# Altium PCB RC Transmitter PCBDoc.PcbDoc
Units mil, origin at the board's own origin, x right, y up, seen from the top; angles counter-clockwise.
Board outline 4175 x 2675 mil, 2 copper layers (Top Layer, Bottom Layer); 25 components, 27 nets, 156 pads, 3 vias.
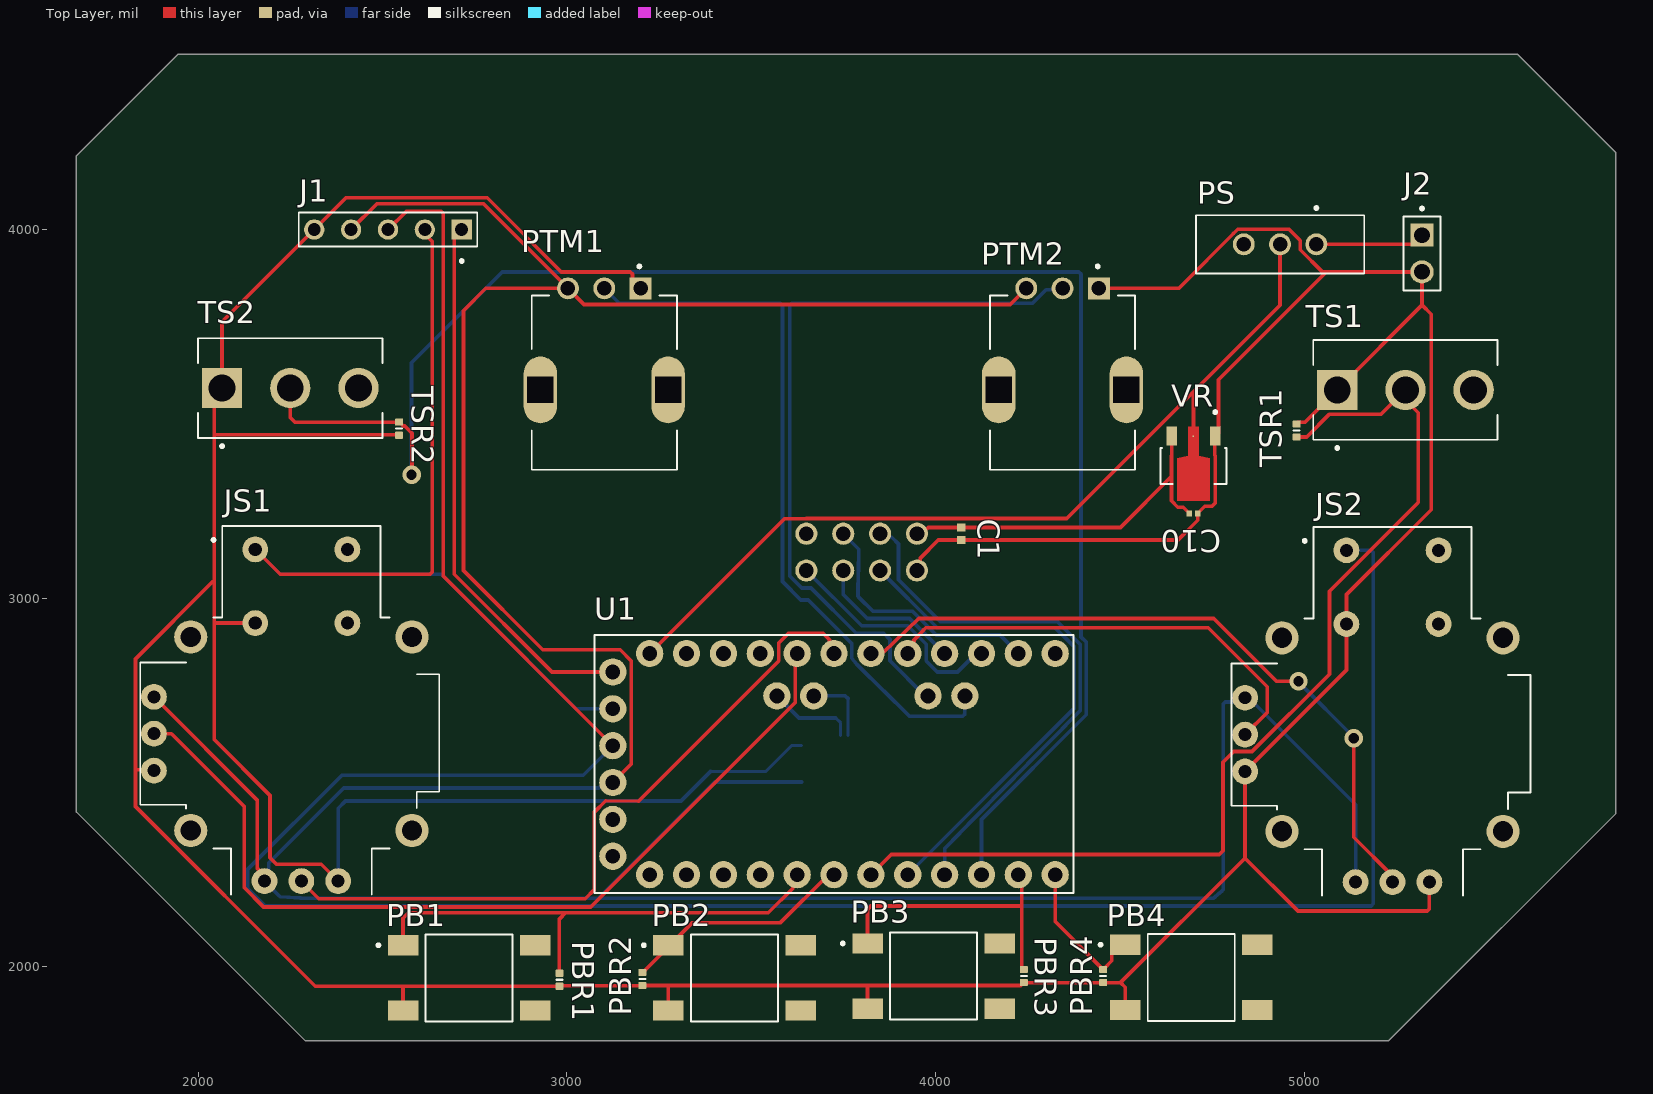
[diagram p0: Top Layer view]
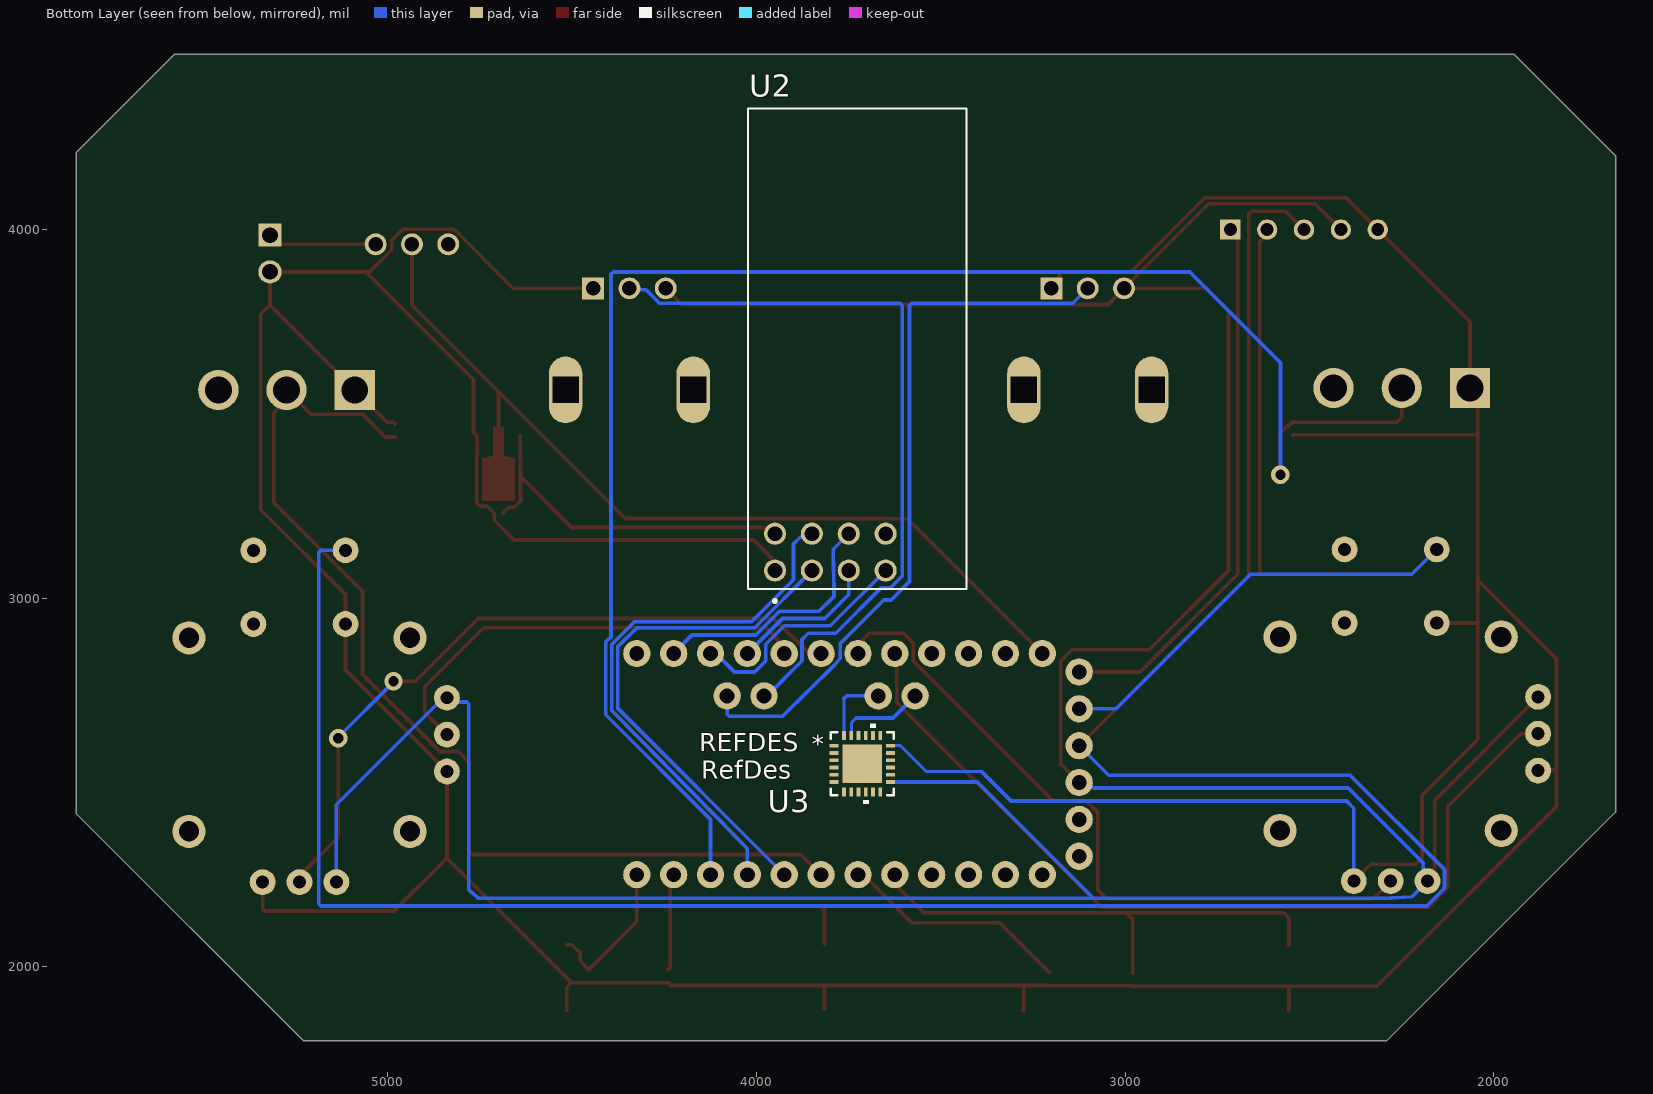
[diagram p1: Bottom Layer view, seen from below]
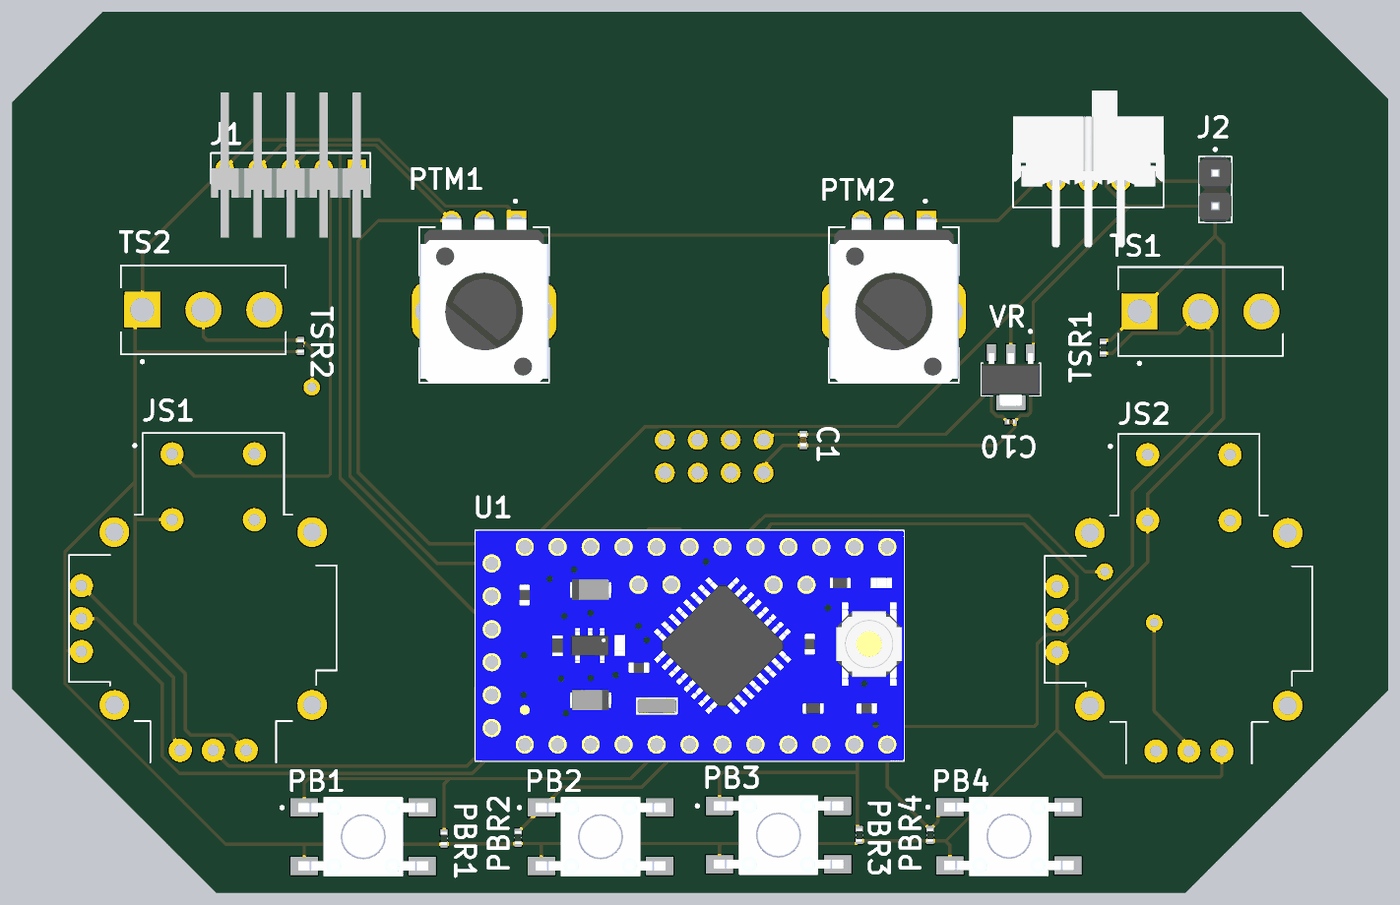
[diagram p2: 3D render of the assembled board from above, using the file's embedded part models]

## Layer stack, top to bottom
Top Solder: solder mask 0.4, Solder Resist, Dk 3.5
Top Layer: signal copper 1.4
Dielectric 1: dielectric 12.6, FR-4, Dk 4.8
Bottom Layer: signal copper 1.4
Bottom Solder: solder mask 0.4, Solder Resist, Dk 3.5

## Board outline
1670,2420 1670,4200 1945,4475 5580,4475 5845,4210 5845,2415 5230,1800 2290,1800

## Design rules (kind name [scope] priority, off if disabled: settings)
Clearance [All] p1: gap=6 ignorepadtopadclearanceinfootprint=FALSE
Height [All] p1: minheight=0 maxheight=1500 prefheight=500
MinimumSolderMaskSliver [All] p1: minsoldermaskwidth=4
PolygonConnect [All] p1: connectstyle=Relief reliefconductorwidth=10 reliefentries=4 polygonreliefangle="90 Angle" airgapwidth=10
RoutingVias [All] p1: holewidth=28 width=50 viastyle="Through Hole" minholewidth=28 minwidth=50 maxholewidth=28 maxwidth=50
SilkToSolderMaskClearance [IsPad] p1: minsilkscreentomaskgap=0 clearancetoexposedcopper=FALSE
SolderMaskExpansion [All] p1: expansion=4 istentingtop=FALSE
SupplyNets "Schematic Supply Nets" [InNet('GND')] p1: voltage=0.000
Width [All] p1: maxlimit=10 minlimit=7 preferedwidth=10
27 further rules are at their usual default settings.

## Classes and differential pairs
component class "RC Transmitter Frontend": J1 J2 JS1 JS2 PB1 PB2 PB3 PB4 PBR1 PBR2 PBR3 PBR4 PS PTM1 PTM2 TS1 TS2 TSR1 TSR2 U1 VR
component class "RC Transmitter Backend": C1 C10 U2 U3

## Components (designator, comment, footprint, x,y, rotation, side; value= is the part's Value field where it differs from the comment)
C1 "1nF" CAPC1005X55N 4070,3175 r270 top
C10 "10nF" CAPC0603X33N 4700,3230 r0 top
J1 "5-146280-5" TE_5-146280-5 2515,4000 r180 top
J2 "M20-9990246" HARWIN_M20-9990246 5320,3935 r270 top
JS1 "COM-09032" XDCR_COM-09032 2280,2632.5 r0 top
JS2 "COM-09032" XDCR_COM-09032 5240,2630 r0 top
PB1 "TS04-66-70-BK-260-SMT" SW_TS04-66-70-BK-260-SMT 2735,1970 r0 top
PB2 "TS04-66-70-BK-260-SMT" SW_TS04-66-70-BK-260-SMT 3455,1970 r0 top
PB3 "TS04-66-70-BK-260-SMT" SW_TS04-66-70-BK-260-SMT 3995,1975 r0 top
PB4 "TS04-66-70-BK-260-SMT" SW_TS04-66-70-BK-260-SMT 4694.13,1971.42 r0 top
PBR1 "10KR2F" RESC0402(1005)_L 2980,1965 r90 top value=10k
PBR2 "10KR2F" RESC0402(1005)_L 3205,1967.28 r90 top value=10k
PBR3 "10KR2F" RESC0402(1005)_L 4240,1975 r90 top value=10k
PBR4 "10KR2F" RESC0402(1005)_L 4455,1975 r90 top value=10k
PS "EG1218" SW_EG1218 4935,3960 r180 top
PTM1 "PT01-D130D-B103" TRIM_PT01-D130D-B103 3101.77,3565 r180 top
PTM2 "PT01-D130D-B103" TRIM_PT01-D130D-B103 4345,3565 r180 top
TS1 "100SP1T1B4M2QE" SW_100SP1T1B4M2QE 5275,3565 r90 top
TS2 "100SP1T1B4M2QE" SW_100SP1T1B4M2QE 2250,3570 r90 top
TSR1 "10KR2F" RESC0402(1005)_L 4980,3455 r270 top value=10k
TSR2 "10KR2F" RESC0402(1005)_L 2545,3460 r90 top value=10k
U1 "ARDUINO_PRO_MINI" MODULE_ARDUINO_PRO_MINI 3725,2550 r90 top
U2 "NRF24L01P-MODULE-PCB" XCVR_NRF24L01P-MODULE-PCB 3726.82,3676.75 r90 bottom
U3 "MPU-6050" QFN24_4X4X0P9-0P5_TDK-L 3713.56,2550.78 r180 bottom
VR "HT7333" IC_HT7333 4700,3365 r180 top

## Footprints (in the part's own frame and the unit in brackets; to place one, negate y for a bottom-side part, rotate by r counter-clockwise, add the part's x,y. Pads: shape width x height; smd on the part's side, far side on the other; paste and mask are expansions set on the pad)
CAPC0603X33N [mm]
  rect 0.38x0.4 smd: 1(-0.281,0) 2(0.281,0)
  body extent -0.3,-0.15 0.3,0.15, height 0.33
CAPC1005X55N [mm]
  rect 0.54x0.6 smd: 1(-0.432,0) 2(0.432,0)
  body extent -0.5,-0.25 0.5,0.25, height 0.55
HARWIN_M20-9990246 [mm]
  rect 1.605x1.605 / inner round 1.605 / far side rect 1.605x1.605 hole 1.07: 1(-1.27,0)
  round 1.605 hole 1.07: 2(1.27,0)
  silkscreen extent -3.2,-1.27 2.54,1.27, body extent -2.54,-1.27 2.54,1.27, height 8.74
IC_HT7333 [mm]
  rect 0.7x1.3 smd: 1(-1.5,-1.9) 3(1.5,-1.9)
  rect 0.1x0.1 smd paste-1 mask+0: 2(0,-1.9)
  Top Layer region: 1.125,-0.375 0.35,-0.56 0.35,-2.55 -0.35,-2.55 -0.35,-0.56 -1.125,-0.375 -1.125,2.55 1.125,2.55
  silkscreen extent -2.27,-3.65 2.27,1.41, body extent -2.25,-1.88 2.25,2.21, height 1.6
MODULE_ARDUINO_PRO_MINI [mil]
  round 74 hole 40: JP1_1(250,600) JP1_2(150,600) JP1_3(50,600) JP1_4(-50,600) JP1_5(-150,600) JP1_6(-250,600) JP2_1(185,55) JP2_2(185,155) JP3_1(185,-355) JP3_2(185,-255) JP6_1(300,500) JP6_2(300,400) JP6_3(300,300) JP6_4(300,200) JP6_5(300,100) JP6_6(300,0) JP6_7(300,-100) JP6_8(300,-200) JP6_9(300,-300) JP6_10(300,-400) JP6_11(300,-500) JP6_12(300,-600) JP7_1(-300,-600) JP7_2(-300,-500) JP7_3(-300,-400) JP7_4(-300,-300) JP7_5(-300,-200) JP7_6(-300,-100) JP7_7(-300,0) JP7_8(-300,100) JP7_9(-300,200) JP7_10(-300,300) JP7_11(-300,400) JP7_12(-300,500)
  silkscreen extent -350,-650 350,650, body extent -350,-650 350,650, height 133
QFN24_4X4X0P9-0P5_TDK-L [mil]
  rect 23.87x10.03 smd paste+0 mask+0: 1(-76.44,49.22) 2(-76.44,29.53) 3(-76.44,9.84) 4(-76.44,-9.85) 5(-76.44,-29.54) 6(-76.44,-49.22) 13(76.44,-49.22) 14(76.44,-29.54) 15(76.44,-9.85) 16(76.44,9.84) 17(76.44,29.53) 18(76.44,49.22)
  rect 10.03x23.87 smd paste+0 mask+0: 7(-49.22,-76.44) 8(-29.53,-76.44) 9(-9.84,-76.44) 10(9.85,-76.44) 11(29.54,-76.44) 12(49.22,-76.44) 19(49.22,76.44) 20(29.54,76.44) 21(9.85,76.44) 22(-9.84,76.44) 23(-29.53,76.44) 24(-49.22,76.44)
  rect 108x104 smd paste+0 mask+0: 25(0,0)
  silkscreen extent -86,-108 86,108, body extent -81,-81 81,81, height 37
RESC0402(1005)_L [mm] "Chip Resistor, Body 1.0x0.5mm, IPC High Density"
  rrect25% 0.5x0.55 smd: 1(-0.45,0) 2(0.45,0)
  silkscreen extent 0,-0.2 0,0.2, body extent -0.5,-0.25 0.5,0.25, height 0.3
SW_100SP1T1B4M2QE [mm]
  rect 2.775x2.775 hole 1.85: 1(0,4.7)
  round 2.775 hole 1.85: 2(0,0) 3(0,-4.7)
  silkscreen extent -4.1,-6.35 3.43,6.35
SW_EG1218 [mm]
  round 1.508 hole 1: 1(-2.5,0) 2(0,0) 3(2.5,0)
  silkscreen extent -5.8,-2.6 5.8,2, body extent -5.8,-7 5.8,5.1, height 2
SW_TS04-66-70-BK-260-SMT [mm]
  rect 2.1x1.4 smd: 1(-4.55,2.25) 2(-4.55,-2.25) 3(4.55,2.25) 4(4.55,-2.25)
  silkscreen extent -6.35,-3 3,3, body extent -5,-3 5,3, height 7
TE_5-146280-5 [mm]
  rect 1.398x1.398 / inner round 1.398 / far side rect 1.398x1.398 hole 0.89: 1(-5.08,0)
  round 1.398 hole 0.89: 2(-2.54,0) 3(0,0) 4(2.54,0) 5(5.08,0)
  silkscreen extent -6.15,-1.17 6.15,2.27, body extent -6.15,-5.84 6.15,5.33, height 1.17
TRIM_PT01-D130D-B103 [mm]
  rect 1.508x1.508 / inner round 1.508 / far side rect 1.508x1.508 hole 1: 1(-2.5,-7)
  round 1.508 hole 1: 2(0,-7) 3(2.5,-7)
  oval 2.3x4.6 hole 1.8 square: S1(-4.4,0) S2(4.4,0)
  silkscreen extent -5,-8.61 5,5.5, body extent -5.7,-7.2 5.7,5.5, height 30.5
XCVR_NRF24L01P-MODULE-PCB [mil]
  round 60 hole 40: 1(-601.75,223.18) 2(-501.75,223.18) 3(-601.75,123.18) 4(-501.75,123.18) 5(-601.75,23.18) 6(-501.75,23.18) 7(-601.75,-76.82) 8(-501.75,-76.82)
  silkscreen extent -688,-297 652,297
XDCR_COM-09032 [mil]
  round 70 hole 35.43: B1A(-125,500) B1B(125,500) B2A(-125,300) B2B(125,300)
  round 70 hole 35: H1(-100,-400) H2(0,-400) H3(100,-400) V1(-400,100) V2(-400,0) V3(-400,-100)
  round 90 hole 55: S1(-300,262.5) S2(-300,-262.5) S3(300,-262.5) S4(300,262.5)
  silkscreen extent -437,-437 374,563

## Part data
C1: library part GRM155R61A102KA01D, "SMD-ÐºÐ¾Ð½Ð´ÐµÐ½ÑÐ°Ñ‚Ð¾Ñ€ X5R(EIA) Ñ Ñ‘Ð¼ÐºÐ¾ÑÑ‚ÑŒÑŽ 1000 Ð¿Ð¤, Ð´Ð¾Ð¿ÑƒÑÐº 10 %. ÐÐ¾Ð¼Ð¸Ð½Ð°Ð»ÑŒÐ½Ð¾Ðµ Ð½Ð°Ð¿Ñ€ÑÐ¶ÐµÐ½Ð¸Ðµ: 10 Ð’ Ð¿Ð¾ÑÑ‚Ð¾ÑÐ½Ð½Ð¾Ð³Ð¾ Ñ‚Ð¾ÐºÐ°", Package="1005-2 Murata", Check_prices=https://www.snapeda.com/parts/GRM155R61A102KA01D/Murata+Electronics+North+America/view-part/?ref=eda, MF="Murata Electronics", MP=GRM155R61A102KA01D, SnapEDA_Link=https://www.snapeda.com/parts/GRM155R61A102KA01D/Murata+Electronics+North+America/view-part/?ref=snap
C10: library part GRM033R71A103KA01D, "10000 pF Â±10% 10V Ceramic Capacitor X7R 0201 (0603 Metric)", Package="0603 Murata", Check_prices=https://www.snapeda.com/parts/GRM033R71A103KA01D/Murata/view-part/?ref=eda, ComponentLink1Description="New link", MF=Murata, MP=GRM033R71A103KA01D, SnapEDA_Link=https://www.snapeda.com/parts/GRM033R71A103KA01D/Murata/view-part/?ref=snap
J1: "05 MODII HDR SRST B/A .100CL", Package=None, Availability=Unavailable, MP=5-146280-5, Price=None
J2: "2.54mm (0.1) Pitch SIL Vertical Throughboard Pin Header, 6.1mm mating pin height, tin, 2 contacts", Package=None, Check_prices=https://www.snapeda.com/parts/M20-9990246/Harwin/view-part/?ref=eda, MF=Harwin, MP=M20-9990246, SnapEDA_Link=https://www.snapeda.com/parts/M20-9990246/Harwin/view-part/?ref=snap
JS1 JS2: "Thumb Joystick", Package=None, Availability=Unavailable, MP=COM-09032, Price=None
PB1 PB2 PB3 PB4: "6 x 6 mm, 7 mm Actuator Height, 260 gf, Black, Surface Mount, SPST, Tactile Switch", Package=None, Check_prices=https://www.snapeda.com/parts/TS04-66-70-BK-260-SMT/Same+Sky/view-part/?ref=eda, MF="Same Sky", MP=TS04-66-70-BK-260-SMT, SnapEDA_Link=https://www.snapeda.com/parts/TS04-66-70-BK-260-SMT/Same+Sky/view-part/?ref=snap
PBR1 PBR2 PBR3 PBR4 TSR1 TSR2: library part CMP-009-00066-2, "10K 0.063W 1% 0402 (1005 Metric)  SMD", Case/Package=0402, Power=63mW, Tolerance=1%, Mounting Technology=SMT, Pins=2
PS: "Slide Switch, EG Series, SPDT, Non-Shorting, ON-ON, 200mA DC, 30VDC, PC Pin", Package=None, Check_prices=https://www.snapeda.com/parts/EG1218/E-Switch/view-part/?ref=eda, MF=E-Switch, MP=EG1218, SnapEDA_Link=https://www.snapeda.com/parts/EG1218/E-Switch/view-part/?ref=snap
PTM1 PTM2: "10 mm, Vertical, Linear, 10 kÎ©, Through Hole, D-cut Rotary Potentiometer", Package=None, Check_prices=https://www.snapeda.com/parts/PT01-D130D-B103/Same+Sky/view-part/?ref=eda, MF="Same Sky", MP=PT01-D130D-B103, SnapEDA_Link=https://www.snapeda.com/parts/PT01-D130D-B103/Same+Sky/view-part/?ref=snap
TS1 TS2: "Toggle Switch SPDT Through Hole", Package=None, Availability=Unavailable, MP=100SP1T1B4M2QE, Price=None
U1: "This board was developed for applications and installations where space is premium and projects are made as permanent set ups. Small, available in 3.3 V and 5 V versions, powered by ATmega328P.", Package=None, Check_prices=https://www.snapeda.com/parts/Arduino%20Pro%20Mini/Arduino/view-part/?ref=eda, MF=Arduino, MP="Arduino Pro Mini", SnapEDA_Link=https://www.snapeda.com/parts/Arduino%20Pro%20Mini/Arduino/view-part/?ref=snap
U2: "- Transceiver For Use With nRF24L01+", Package=None, Availability=Bad, MF="Nordic Semiconductor", Mouser-Purchase-URL=https://snapeda.com/shop?store=Mouser&id=230534, MP=NRF24L01P-MODULE-PCB, Price=None, SnapEDA_Link=https://www.snapeda.com/parts/NRF24L01P-MODULE-PCB/Nordic%20Semiconductor%20ASA/view-part/230534/?ref=snap
U3: "Description", Manufacturer_Name=TDK, Copyright="Copyright (C) 2025 Ultra Librarian. All rights reserved.", Manufacturer_Part_Number=MPU-6050, RefDes=RefDes, Type="Motion Sensors"
VR: "Three-terminal, low power, high voltage regulator implemented in CMOS technology", Package=None, Check_prices=https://www.snapeda.com/parts/HT7333/Holtek/view-part/?ref=eda, MF="Holtek Semiconductor", MP=HT7333, SnapEDA_Link=https://www.snapeda.com/parts/HT7333/Holtek/view-part/?ref=snap

## Via types
v1: diameter 50, hole 28, Top Layer to Bottom Layer, 3 vias

## Nets (pads, with @x,y where several pads share a name; then routed paths per layer and width w, separated by ;. In a path a pad name is that pad's centre, name@x,y a point inside that pad or via, vN(x,y) a via of type N, cw(c..) or ccw(c..) an arc to the next point about the centre after c; other vN are vias at no path point)
DTR: J1.1 U1.JP1_1 | length 1483.1
  Top Layer w10: J1.1 2695,3980 2695,3065 2960,2800 U1.JP1_1
GND: C1.2 C10.2 J1.5 J2.2 JS1.B2A JS1.H3 JS1.V3 JS2.B2A JS2.H3 JS2.V3 PB1.2 PB2.2 PB3.2 PB4.2 PBR1.1 PBR2.1 PBR3.1 PBR4.1 PTM1.1 PTM2.1 TS1.1 TS2.1 TSR1.1 TSR2.1 U2.1 U3.18 VR.1 | length 15249.2
  Top Layer w10: JS1.V3 1877.5,2535 1830,2535 ; 2040,3045 1830,2835 1830,2535 ; JS1.B2A 2045.99,2932.5 2043.49,2930 ; JS1.H3 2334,2278.5 2212.36,2278.5 2195,2295.86 2195,2465 2043.49,2616.51 2043.49,2930 ; TSR2.1 2544.18,3443.1 2045.38,3443.1 2043.49,3445 ; PB1.2 2555.87,1946.42 2555,1947.28 ; PTM1.1 3178.17,3862.62 3178.17,3879.14 3172.31,3885 2985,3885 2784,4086 2401,4086 J1.5 2064.96,3749.96 TS2.1 2043.49,3548.53 2043.49,3445 ; PB2.2 3275,1882.28 3275,1949.57 ; PB3.2 3815.87,1945.43 3820,1949.57 ; U2.1 3959.32,3084.33 3959.32,3109.32 4007.99,3157.99 C1.2 4657.99,3157.99 4711.42,3211.42 4711.42,3230.52 4730.5,3249.61 4750.5,3249.61 4759.29,3258.39 4759.29,3385.98 4757.63,3387.63 4757.63,3438.38 VR.1 4767.83,3448.58 4767.83,3592.83 5060,3885 ; PTM2.1 4656.45,3840.59 4660.59,3840.59 4666.45,3846.45 4807.71,3988.67 cw(c4836.57,3960) 4809.05,3989.96 4817.81,3998.04 4820.69,4000.69 4959.31,4000.69 4990,3970 4990,3945 5050,3885 5060,3885 ; PB4.2 4515,1944.68 4502.39,1957.28 ; TSR1.1 4984.84,3477.56 5002.52,3477.56 TS1.1 5320,3795.04 ; JS2.H3 5340,2157.28 5334.14,2151.42 4983.47,2151.42 4840,2294.89 ; 1830,2535 1830,2435.15 2317.86,1947.28 2555,1947.28 ; 2043.49,2930 2043.49,3045 2043.49,3445 ; 2555,1947.28 PBR1.1 2981.14,1948.43 3203.86,1948.43 PBR2.1 3275,1949.57 ; 3275,1949.57 3815.87,1949.57 3820,1949.57 ; 3820,1949.57 4231.3,1949.57 4239.02,1957.28 PBR3.1 PBR4.1 4502.39,1957.28 ; 4502.39,1957.28 4840,2294.89 ; 4840,2294.89 JS2.V3 5115,2805 JS2.B2A 5115,3010 5345,3240 5345,3770.04 5320,3795.04 ; 5060,3885 J2.2 5320,3795.04
  Bottom Layer w8: 3390,2530 3540,2530 3610,2600 U3.18
  Bottom Layer w10: JS1.V3 JS1.V3@1896.24,2532.5 ; JS1.H3 2380,2430 2400,2450 3310,2450 3390,2530
JSH1: JS1.H2 U1.JP6_6 | length 1952.3
  Top Layer w10: JS1.H2 2327.5,2185 3050,2185 3075,2210 3075,2420 3105.5,2450.5 3194.5,2449.5 3575,2830 3575,2878.71 3601.29,2905 3695,2905 3712.75,2887.25 3712.75,2862.25 U1.JP6_6
JSH2: JS2.H2 U1.JP6_7 | length 1919.1
  Top Layer w10: U1.JP6_7 3855.62,2850 3891.86,2884.73 3955,2945 4755,2945 4925,2775 v1(4985,2775) ; v1(5135,2620) 5135,2351.24 5240,2246.24 JS2.H2
  Bottom Layer w10: v1(4985,2775) 4985,2772.5 5135,2622.5 v1(5135,2620)
JSV1: JS1.V2 U1.JP6_5 | length 2428.2
  Top Layer w10: JS1.V2 1927.5,2632.5 2125,2435 2125,2236.23 2125,2214.99 2177.49,2162.5 3065.38,2162.5 3620,2717.12 3620,2845 U1.JP6_5
JSV2: JS2.V2 U1.JP6_8 | length 1237.5
  Top Layer w10: U1.JP6_8 3936.77,2861.77 3936.77,2879.09 3941.77,2884.09 3941.77,2886.77 3967.93,2912.93 3967.93,2914.14 3973.79,2920 4740,2920 4900,2760 4900,2690 JS2.V2
NetC1_1: C1.1 C10.1 U2.2 VR.3 | length 993.6
  Top Layer w10: U2.2 3963.53,3175 3980.54,3192.01 C1.1 4502.01,3192.01 4640.71,3330.71 ; VR.3 4640.94,3386.21 4640.71,3385.98 4640.71,3330.71 ; C10.1 4688.94,3230.39 4672.31,3247.02 4657.74,3247.02 4640.71,3264.05 4640.71,3330.71
NetJ2_1: J2.1 PS.1 | length 296.9
  Top Layer w10: PS.1 5295,3960 J2.1
NetPB1_1: PB1.1 PBR1.2 U1.JP7_8 | length 1376.9
  Top Layer w10: PB1.1 2555.87,2132.37 2570,2146.5 2996.5,2146.5 ; PBR1.2 2980,2130 2996.5,2146.5 ; U1.JP7_8 3612.75,2237.75 3612.75,2212.75 3546.5,2146.5 2996.5,2146.5
NetPB2_1: PB2.1 PBR2.2 U1.JP7_7 | length 629.8
  Top Layer w10: PBR2.2 3205.98,1985 3340.98,2120 3580,2120 3710,2250 U1.JP7_7
NetPB3_1: PB3.1 PBR3.2 U1.JP7_2 | length 784.7
  Top Layer w10: PB3.1 3815.87,2155.87 3825,2165 4234.17,2165 ; U1.JP7_2@4225,2243.71 U1.JP7_2 4234.17,2240.83 4234.17,2165 ; PBR3.2 4239.02,1992.72 4234.17,1997.56 4234.17,2165
NetPB4_1: PB4.1 PBR4.2 U1.JP7_1 | length 412.5
  Top Layer w10: U1.JP7_1 4325,2122.72 4449.17,1998.54 4449.17,1997.56 4454.02,1992.72 PBR4.2 4455.98,1992.72 4460.83,1997.56 4460.83,1998.54 4478.66,2016.38 4478.66,2037.44 4501.22,2060 PB4.1
NetPS_2: PS.2 U1.JP6_1 VR.2 | length 2386.2
  Top Layer w10: U1.JP6_1 3587.07,3212.07 3590,3215 3649.25,3215.99 cw(c3650,3175) 3650,3216 3950,3216 cw(c3950,3175) 3950.12,3216 4356,3216 4700,3560 ; VR.2 4700,3560 ; PS.2 4935,3795 4700,3560
NetPTM1_2: PTM1.2 U1.JP3_1 | length 1973
  Bottom Layer w10: PTM1.2 3142.46,3799.91 3579.14,3799.91 3585,3794.05 3585,3045 3635,2995 3655,2995 3773,2877 3773,2840.87 3773,2836.73 3788.71,2818.58 ccw(c3825,2850) 3791.39,2815.73 3926.55,2682.87 3929.47,2680 3933.56,2680 4074.14,2680 4080,2685.86 U1.JP3_1
NetPTM2_2: PTM2.2 U1.JP3_2 | length 2036.9
  Bottom Layer w10: U1.JP3_2 3972.12,2735 3877,2830.12 3877,2888 3860,2905 3785,2905 3662.5,3027.5 3637.5,3027.5 3605,3060 3605,3794.05 3610.86,3799.91 4263.43,3799.91 4300.31,3836.79 4341.2,3836.79 PTM2.2
NetU1_JP2_1: U1.JP2_1 U3.24 | length 196.4
  Bottom Layer w8: U3.24 3762.79,2727.79
  Bottom Layer w10: U1.JP2_1 3755.58,2735 3762.79,2727.79
NetU1_JP2_2: U1.JP2_2 U3.23 | length 238.1
  Bottom Layer w8: 3730.01,2674.99 3743.1,2661.9 U3.23
  Bottom Layer w10: U1.JP2_2 3630.01,2674.99 3730.01,2674.99
NetU1_JP6_9: U1.JP6_9 U2.5 | length 406.3
  Bottom Layer w10: U2.5 3750,3010 3815,2945 3930,2945 U1.JP6_9
NetU1_JP6_10: U1.JP6_10 U2.7 | length 636
  Bottom Layer w10: U2.7 3800,2925 3925,2925 3975,2875 3975,2830 4005,2800 4060,2800 4110,2850 U1.JP6_10
NetU1_JP6_11: U1.JP6_11 U2.6 | length 686.6
  Bottom Layer w10: U2.6 3791.88,3133.12 3791.88,3128.89 3790,3013.28 3790,3005 3792.93,3002.07 3830,2965 3937.38,2965 4002.38,2900 4175,2900 U1.JP6_11
NetU1_JP7_4: U1.JP7_4 U2.4 | length 1499.1
  Bottom Layer w10: U2.4 3859.57,3165.43 3881.77,3165.43 3900,3147.2 3900,3050 4014,2936 4331.37,2936 4393,2874.37 4393,2695.37 4390.13,2692.45 4109,2406.63 4025,2320 4025,2315.86 U1.JP7_4
NetU1_JP7_5: U1.JP7_5 U2.3 | length 1417.8
  Bottom Layer w10: U2.3 4005,2920 4324.75,2920 4377,2867.75 4377,2702 U1.JP7_5
Rx1: J1.3 JS2.B1A U1.JP1_3 | length 7092.8
  Top Layer w10: J1.3 2565,4050 2659.14,4050 2665,4044.14 2665,3060 U1.JP1_3
  Bottom Layer w10: U1.JP1_3 3045,2520 2390,2520 2134,2264 2134,2213.45 2182.45,2165 5181.64,2165 5187.5,2170.86 5187.5,3124.14 5181.64,3130 JS2.B1A
TS1: TS1.2 TSR1.2 U1.JP7_6 | length 2842.2
  Top Layer w10: U1.JP7_6 3880,2305 4770,2305 4780,2315 4780,2555 4809,2584 4859.05,2584 5069,2793.95 5069,3018.95 5310,3259.95 5310,3503.14 5275,3538.14 TS1.2 5209.37,3499.37 5069.37,3499.37 5007.28,3437.28 TSR1.2@4980.98,3437.28
TS2: TS2.2 TSR2.2 U1.JP7_3 | length 4517.6
  Top Layer w10: TS2.2 2250,3490 2262.28,3477.72 2545.98,3477.72 2556.57,3467.13 2560.6,3467.13 2580,3447.72 2580,3336 v1(2579,3335)
  Bottom Layer w10: v1(2579,3335) 2579,3639 2825,3885 4389.14,3885 4395,3879.14 4395,2895 4409,2881 4409,2684 4125,2400 U1.JP7_3
TX0: J1.2 JS1.B1A U1.JP1_2 | length 2597
  Top Layer w10: JS1.B1A 2222.5,3065 2629.14,3065 2635,3070.86 2635,3967.81 2615,3987.81 J1.2
  Bottom Layer w10: JS1.B1A 2222.5,3065 2428.99,3065 2660,3065 3025,2700 U1.JP1_2
VCC: J1.4 JS1.H1 JS1.V1 JS2.H1 JS2.V1 PTM1.3 PTM2.3 U1.JP1_4 U3.13 | length 10121.3
  Top Layer w10: JS1.V1 2160,2452.5 2160,2268.36 2180,2248.36 JS1.H1 ; J1.4 2485,4070 2773.94,4070 PTM1.3 ; U1.JP1_4 3175,2550 3175,2830 3145,2860 2935,2860 2720,3075 2720,3780 2780.59,3840.59 PTM1.3 ; PTM2.3 4202.95,3796.97 3046.97,3796.97 PTM1.3
  Bottom Layer w10: U1.JP1_4 3112.75,2487.75 3089.9,2487.75 3087.14,2485 2395,2485 2191.48,2281.48 2191.48,2243.98 JS1.H1 2219.57,2192.93 2222.5,2190 2277.13,2186.59 ccw(c2280,2232.5) 2280,2186.5 3086.5,2186.5 ; 3400,2500 3086.5,2186.5 ; 3401.46,2500 3403.01,2501.55 U3.13 ; JS2.H1 5140,2440 4850,2730 JS2.V1 4828.52,2718.52 4786.3,2718.52 4780.45,2712.66 4780.45,2209.24 4777.32,2206.11 4758.22,2189.04 4755.37,2186.5 3086.5,2186.5
pads on no net: JS1.B1B JS1.B2B JS1.S1 JS1.S2 JS1.S3 JS1.S4 JS2.B1B JS2.B2B JS2.S1 JS2.S2 JS2.S3 JS2.S4 PB1.3 PB1.4 PB2.3 PB2.4 PB3.3 PB3.4 PB4.3 PB4.4 PS.3 PTM1.S1 PTM1.S2 PTM2.S1 PTM2.S2 TS1.3 TS2.3 U1.JP1_5 U1.JP1_6 U1.JP6_2 U1.JP6_3 U1.JP6_4 U1.JP6_12 U1.JP7_9 U1.JP7_10 U1.JP7_11 U1.JP7_12 U2.8 U3.1 U3.2 U3.3 U3.4 U3.5 U3.6 U3.7 U3.8 U3.9 U3.10 U3.11 U3.12 U3.14 U3.15 U3.16 U3.17 U3.19 U3.20 U3.21 U3.22 U3.25

## Silkscreen, mask and mechanical layers (free items; w line width, h text height)
Mechanical 1:
  the board outline again, w10

## Text inside footprints (layer, text, board x,y; h text height)
U3: Mechanical 13 "RefDes2" at 3801.06,2525.78 h50; Mechanical 13 "*" at 3759.56,2575 h50; Bottom Overlay "REFDES" at 4155,2585 h50; Bottom Overlay "RefDes" at 4150,2510 h50; Bottom Overlay "*" at 3850,2580 h50